# Altium PCB SX1308_GTW_e381v02c.PcbDoc (part 2 of 3)
Units mil, origin at the board's own origin, x right, y up, seen from the top; angles counter-clockwise.
Board outline 2874.02 x 1220.47 mil, 4 copper layers (Top Layer, MidLayer1 - GND, MidLayer2 - Power, Bottom Layer), stack 62.441 mil thick; 180 components, 130 nets, 612 pads, 859 vias.
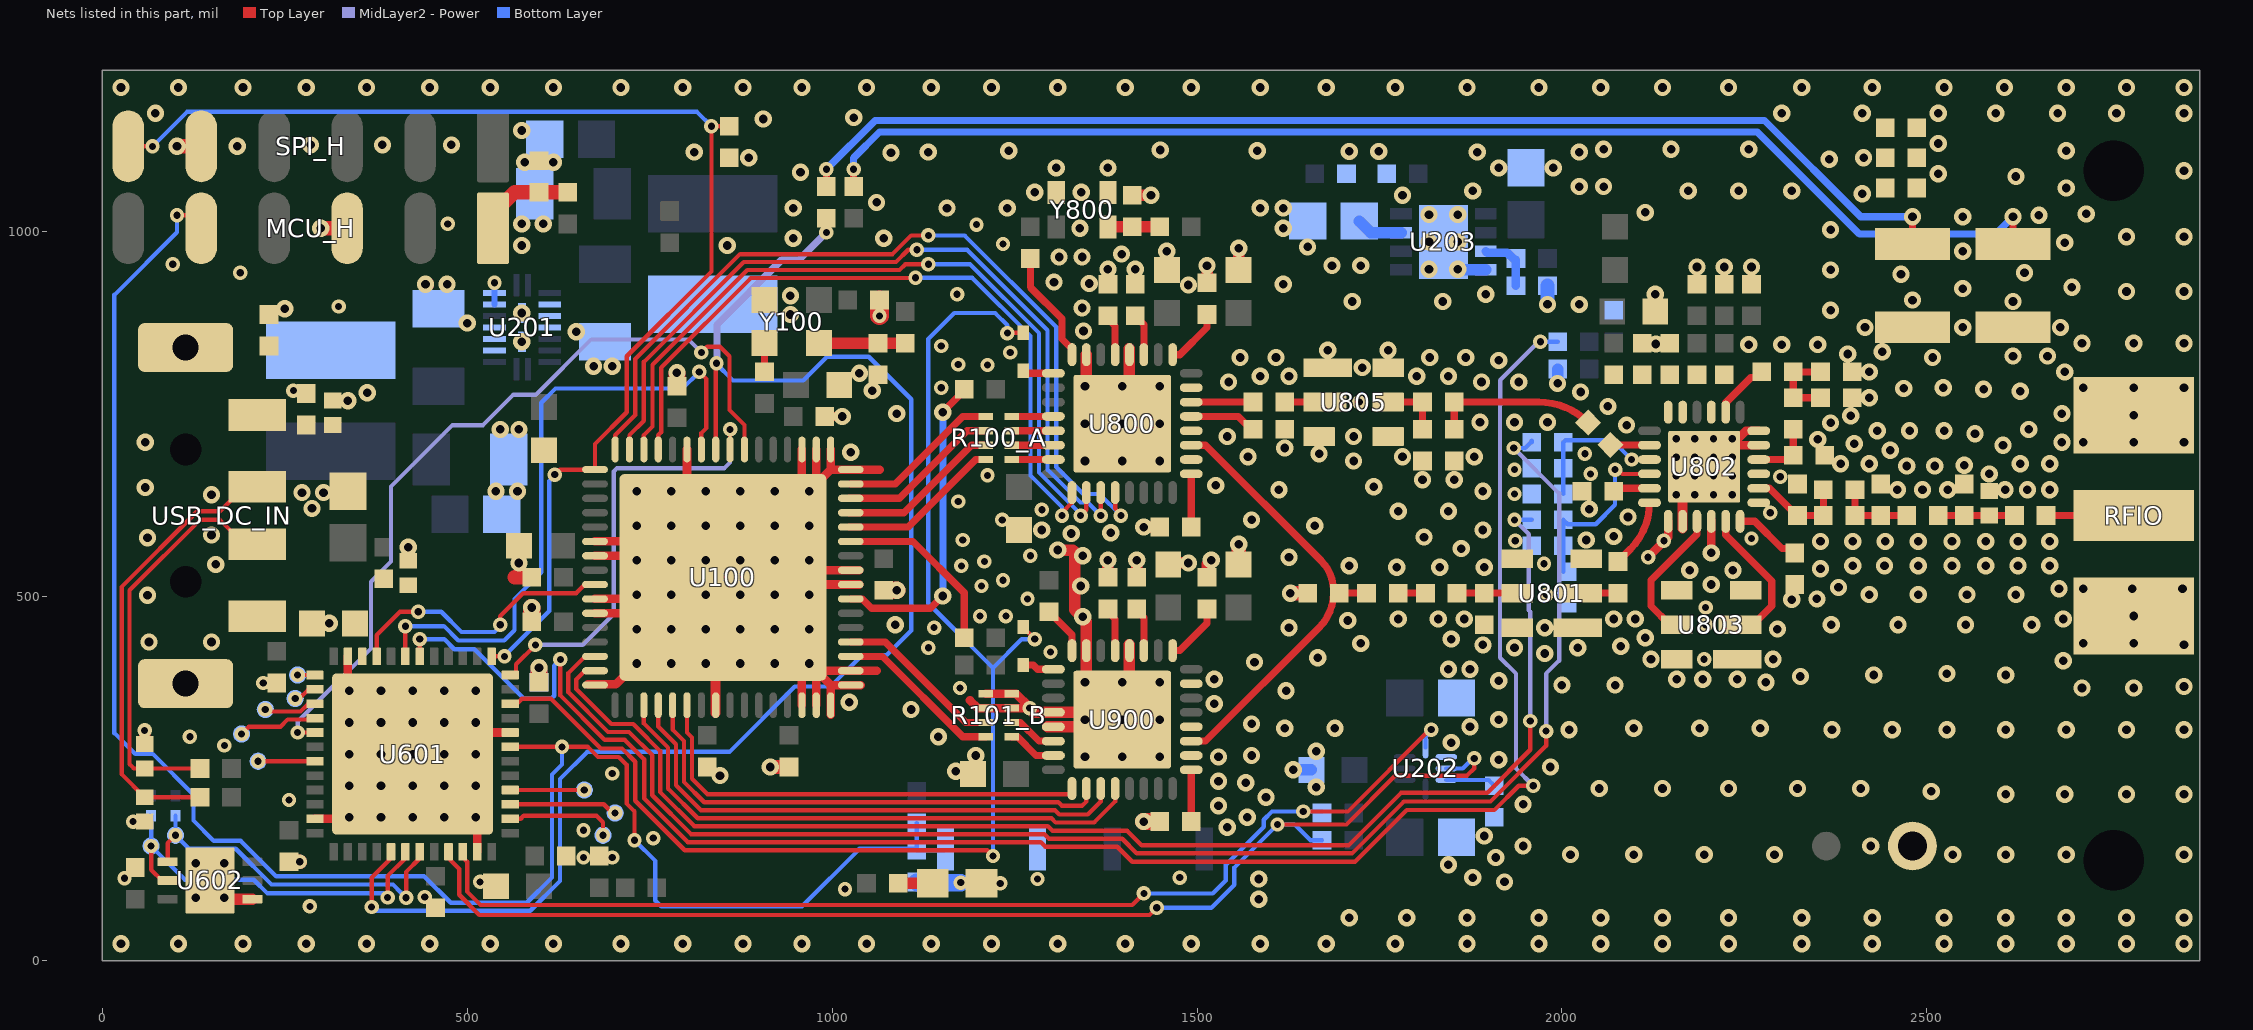
[diagram p4: the nets of this part, all layers, seen from the top]

## Via types
v1: diameter 23.62, hole 11.81, Top Layer to Bottom Layer, tented both sides, 584 vias
v2: diameter 19.68, hole 9.84, Top Layer to Bottom Layer, tented both sides, 166 vias
v3: diameter 23.62, hole 11.81, Top Layer to Bottom Layer, tented top, 89 vias
v4: diameter 19.68, hole 10, Top Layer to Bottom Layer, tented top, 16 vias
v5: diameter 25.59, hole 11.81, Top Layer to Bottom Layer, tented both sides, 3 vias
v6: diameter 18.9, hole 9.84, Top Layer to Bottom Layer, tented both sides, 1 vias

## Nets (pads, with @x,y where several pads share a name; then routed paths per layer and width w, separated by ;. In a path a pad name is that pad's centre, name@x,y a point inside that pad or via, vN(x,y) a via of type N, cw(c..) or ccw(c..) an arc to the next point about the centre after c; other vN are vias at no path point) (continued)
GND: 5V.2 868MHz.1 868MHz.2 915MHz.1 915MHz.2 C100.1 C101.1 C102.1 C104.1 C105.1 C106.1 C107.1 C108.1 C109.1 C110.1 C111.1 C112.1 C113.1 C114.1 C115.2 C201.2 C202.2 C203.2 C204.2 C205.2 C206.2 C207.2 C208.2 C209.1 C210.2 C211.2 C601.1 C602.1 C603.1 C604.1 C605.1 C606.1 C607.1 C608.1 C609.1 C610.1 C611.1 C612.1 C800.1 C802.2 C803.1 C804.2 C805.2 C806.1 C807.1 C808.1 C814.2 C815.1 C818.1 C819.1 C820.1 C821.1 C822.1 C823.1 C825.1 C826.1 C827.1 C828.2 C831.1 C832.2 C900.1 C903.1 C904.2 C905.2 C906.1 C907.1 C908.1 D201.2 D202.2 D203.2 D204.2 D801.2 FB202.2 FB203.1 GND1.1 L800.1 MCU_H.3 NRST.2 Other.1 Other.2 R101_B.1 R101_B.2 R101_B.7 R101_B.8 R110.1 R114.2 R115.2 R203.2 R602.1 R606.1 R607.1 R801.2 R802.2 R807.1 R809.1 RFIO.2 RX_ON.2 SPI_H.5 TX_ON.2 U100.6 U100.7 U100.10 U100.11 U100.16 U100.24 U100.30 U100.31 U100.32 U100.33 U100.34 U100.40 U100.41 U100.48 U100.49 U100.50 U100.51 U100.59 U100.65 U201.3 U201.4 U201.6 U201.7 U201.12 U201.13 U201.19 U201.20 U202.5 U203.8 U203.9 U601.8 U601.23 U601.35 U601.47 U601.49 U602.4 U602.7 U800.4 U800.7 U800.26 U800.28 U800.31 U800.33 U801.1 U801.3 U801.4 U801.6 U802.7 U802.8 U802.10 U802.13 U802.15 U802.17 U802.18 U802.25 U803.1 U803.3 U803.4 U803.6 U805.1 U805.3 U805.4 U805.6 U900.4 U900.7 U900.12 U900.13 U900.26 U900.28 U900.31 U900.33 Y100.2 Y800.1 Y800.2 | length 2998
  Top Layer w7.87: v2@2283.46,611.38 v2@2283.46,614.17
  Top Layer w11.81: U601.35@291.34,194.88 U601.49@346.46,194.88 ; U601.49@336.61,374.02 U601.23@336.61,417.32 ; U601.49@509.84,311.02 511.81,312.99 U601.8@559.06,312.99 ; U601.47@513.78,149.61 U601.49@513.78,196.85 ; U100.16@665.35,379.02 703.82,379.02 v3(732.28,407.48) U100.65@722.44,397.64 ; U100.11@675.2,476.38 U100.65@726.38,476.38 ; U100.10@675.2,496.06 716.54,496.06 U100.65@718.5,494.09 ; U100.7@675.2,555.12 U100.65@726.38,555.12 ; U100.6@675.2,574.8 714.57,574.8 U100.65@716.54,572.83 ; U100.65@801.18,657.48 U100.59@801.18,700.79 ; U100.65@954.72,517.72 956.69,515.75 U100.40@1025.59,515.75 U100.40@1037.4,515.75 ; U100.30@958.66,350.39 958.66,401.57 U100.65@960.63,403.54 ; U100.65@958.66,659.45 U100.51@958.66,700.79 ; U100.65@966.54,535.43 U100.41@1025.59,535.43 U100.41@1037.4,535.43 ; v3(968.5,407.48) U100.65@978.35,397.64 ; v3(968.5,643.7) 998.03,673.23 ; U100.31@978.35,350.39 U100.65@978.35,397.64 ; U100.65@978.35,655.51 U100.50@978.35,700.79 ; C105.1@990.16,746.06 v1(1013.78,746.06) ; U100.32@998.03,337.6 U100.32@998.03,350.39 998.03,377.95 ; U100.49@998.03,700.79 998.03,673.23 ; U100.33@1039.37,377.95 U100.33@1025.59,377.95 998.03,377.95 ; 1061.02,397.64 U100.34@1025.59,397.64 U100.65@978.35,397.64 ; 1064.96,673.23 U100.48@1025.59,673.23 998.03,673.23 ; 1188.98,357.03 1199.55,346.46 R101_B.2@1210.63,346.46 R101_B.7@1246.06,346.46 1270.47,346.46 v2@1270.57,346.56 ; R101_B.1@1210.63,366.14 R101_B.8@1246.06,366.14 1251.97,366.14 1270.67,347.44 v2@1270.67,346.46 ; U900.33@1452.76,320.47 U900.33@1452.76,320.87 ; v2(2118.11,553.15) 2145.67,580.71 U802.7@2145.67,602.36 ; v1(2204.72,559.06) U802.10@2204.72,604.33 ; U802.25@2234.25,714.57 2240.31,714.57 2252.12,726.38 U802.18@2269.69,726.38 ; U802.25@2238.19,706.69 U802.17@2269.69,706.69 ; U100.65@978.35,397.64 998.03,377.95
  Top Layer w13.78: U100.24@840.55,339.57 U100.24@840.55,350.39 U100.65@840.55,405.51 ; U802.8@2165.35,592.52 U802.8@2165.35,602.36 U802.25@2165.35,643.7
  Top Layer w15.75: D202.2@58.07,297.24 v2(58.07,315.94) ; U602.7@168.31,86.61 170.28,84.65 U602.4@205.71,84.65 ; U100.65@730.31,496.06 U100.65@734.25,500 ; U100.65@838.58,407.48 U100.65@840.55,405.51 ; v2@1276.57,340.55 U900.12@1303.15,340.55 U900.33@1346.46,340.55 ; U900.13@1295.28,320.87 U900.13@1303.15,320.87 U900.33@1338.58,320.87 ; v1(1309.06,562.99) 1329.92,562.99 1332.28,560.63 1332.28,481.1 1348.43,464.96 U900.7@1348.43,425.2 1348.43,383.86 U900.33@1350.39,381.89 ; U800.7@1348.43,830.71 1348.43,789.37 U800.33@1350.39,787.4 ; C904.2@1377.95,525.59 v1(1377.95,549.21) ; U900.33@1405.51,381.89 1407.48,383.86 U900.4@1407.48,425.2 U900.4@1407.48,433.07 ; U800.33@1407.48,785.43 U800.4@1407.48,830.71 U800.4@1407.48,838.58 ; C815.1@1411.42,1049.21 v1(1437.01,1049.21) ; C803.1@1415.35,927.17 v1(1415.35,947.83) ; C903.1@1417.32,525.59 v1(1417.32,549.21) ; v1(1427.17,594.49) C807.1@1448.82,594.49 ; U900.33@1433.07,318.9 U900.33@1435.04,320.87 ; U800.33@1438.98,690.94 U800.33@1442.91,687.01 ; C806.1@1458.66,946.85 v1(1458.66,972.44) ; C906.1@1460.63,543.31 1462.6,545.28 v1(1488.19,545.28) ; C905.2@1513.78,525.59 1513.78,543.31 v1(1519.69,549.21) ; C805.2@1513.78,929.13 v1(1513.78,952.76) ; C808.1@1557.09,946.85 v1(1557.09,976.38) ; v2@2259.84,578.25 v2(2259.84,578.74)
  Top Layer w19.68: v1(102.36,1116.14) SPI_H.5@135.43,1116.14 ; C603.1@255.91,135.83 v2(270.67,135.83) ; v1(299.21,1003.94) MCU_H.3@335.43,1003.94 ; 564.96,525.59 C109.1@586.61,525.59 ; v1(915.35,265.75) C111.1@940.94,265.75 ; C908.1@1557.09,543.31 v1(1557.09,570.87) ; v1(1627.95,503.94) L800.1@1648.3,503.94
  Top Layer w23.62: C107.1@588.58,464.57 v1(588.58,484.25) ; C605.1@598.43,381.89 v1(598.43,401.57) ; C106.1@787.4,789.37 v1@787.4,805.12 ; C112.1@1070.87,507.87 v1(1088.58,507.87) ; v1(1427.17,190.94) C907.1@1448.82,190.94
  Top Layer w25.59: v2(1064.96,883.86) R606.1@1064.96,905.51
  Bottom Layer w7.87: U201.6@537.4,899.61 U201.7@537.4,915.35 v2@537.4,933.07
  Bottom Layer w15.75: v1@1629.09,261.81 C208.2@1656.65,261.81 ; U203.9@1858.27,946.85 U203.8@1895.67,946.85 ; v1@1994.09,789.37 C606.1@1994.09,811.02
  Bottom Layer w19.68: v1(1980.31,899.61) R203.2@1980.31,925.2
  Bottom Layer w23.62: C607.1@598.43,381.89 v1(598.43,401.57) v1(598.43,401.57) v1@598.46,401.69 ; C609.1@1116.14,108.27 1117.2,107.2 1176.1,107.2 v2(1176.18,107.28)
  other v1: 25.59,23.62 104.33,23.62 192.91,23.62 279.53,23.62 362.2,23.62 448.82,23.62 531.5,23.62 618.11,23.62 710.63,23.62 795.28,23.62 877.95,23.62 958.66,23.62 1047.24,23.62 1135.83,23.62 1218.5,23.62 1309.06,23.62 1401.57,23.62 1492.13,23.62 1586.61,23.62 1677.17,23.62 1771.65,23.62 1870.08,23.62 1968.5,23.62 2053.15,23.62 2137.8,23.62 2228.35,23.62 2328.74,23.62 2425.2,23.62 2523.62,23.62 2608.27,23.62 2690.94,23.62 2773.62,23.62 2852.36,23.62 1708.66,59.06 1787.4,59.06 1870.08,59.06 1968.5,59.06 2053.15,59.06 2137.8,59.06 2228.35,59.06 2328.74,59.06 2425.2,59.06 2523.62,59.06 2608.27,59.06 2690.94,59.06 2773.62,59.06 2852.36,59.06 1584.65,84.65 1921.26,108.27 1584.65,112.2 1877.95,114.17 1844.49,131.89 1909.45,141.73 2011.81,145.67 2098.43,145.67 2194.88,145.67 2291.34,145.67 2535.43,145.67 2608.27,145.67 2690.94,145.67 2852.36,145.67 1946.85,157.48 2423.23,157.48 1893.7,171.26 1541.34,183.07 1568.9,196.85 1529.53,212.6 1946.85,214.57 1594.49,224.41 2608.27,228.35 2688.98,228.35 2773.62,228.35 2852.36,228.35 2505.91,232.28 2051.18,236.22 2137.8,236.22 2228.35,236.22 2322.83,236.22 2409.45,236.22 1663.39,238.19 1566.93,244.09 1529.53,246.06 846.46,253.94 1169.29,259.84 1631.89,261.81 1984.25,265.75 1913.39,275.59 1529.53,279.53 1196.85,281.5 1574.8,281.5 1663.39,287.4 1848.43,299.21 1145.67,307.09 2009.84,316.93 2370.08,316.93 2452.76,316.93 2527.56,316.93 2608.27,316.93 2690.94,316.93 2773.62,316.93 2852.36,316.93 1620.08,318.9 1688.98,318.9 2098.43,318.9 2188.98,318.9 2271.65,318.9 1874.02,320.87 1574.8,324.8 1913.39,330.71 1108.27,344.49 1523.62,352.36 1023.62,354.33 1622.05,370.08 2712.6,374.02 2783.46,374.02 2852.36,375.98 2000,377.95 2072.83,377.95 2279.53,381.89 1913.39,383.86 1523.62,385.83 2157.48,385.83 2192.91,385.83 2240.16,385.83 2326.77,389.76 2427.17,391.73 2608.27,391.73 2527.56,393.7 1844.49,399.61 1874.02,399.61 1578.74,409.45 2687.01,411.42 2122.05,413.39 2289.37,413.39 1665.35,415.35 1976.38,421.26 1935.04,429.13 2021.65,429.13 2080.71,431.1 1891.73,433.07 2852.36,433.07 1724.41,435.04 2714.57,435.04 2783.46,435.04 63.98,437.01 149.61,437.01 1848.43,440.94 2114.17,442.91 2295.28,454.72 1625.98,456.69 1976.38,456.69 1086.61,460.63 2369.09,460.63 2460.63,460.63 2553.15,460.63 2643.7,460.63 311.02,462.6 1706.69,466.54 1775.59,468.5 1830.71,468.5 1866.14,468.5 2070.87,468.5 2100.39,468.5 2687.01,468.5 1343.5,471.46 2314.96,495.08 2349.41,496.06 62.01,500.98 2421.26,501.97 2488.19,501.97 2555.12,501.97 2622.05,501.97 2681.1,509.84 2714.57,509.84 2781.5,509.84 2850.39,509.84 2378.94,511.81 1340.55,513.78 2204.72,515.75 2175.2,535.43 2234.25,535.43 2354.33,537.4 1773.62,539.37 1832.68,539.37 1893.7,539.37 1708.66,541.34 2398.62,541.34 2441.93,541.34 2488.19,541.34 2534.45,541.34 2580.71,541.34 2625,541.34 2668.31,541.34 155.51,543.31 570.87,545.28 1625.98,553.15 1343.5,555.12 1862.2,564.96 419.29,566.93 2354.33,574.8 2398.62,574.8 2442.91,574.8 2488.19,574.8 2534.45,574.8 2580.71,574.8 2625,574.8 2668.31,574.8 2033.46,576.77 62.01,579.72 1811.02,580.71 2070.87,581.69 149.61,583.66 1327.76,585.63 1381.89,586.61 1287.4,590.55 1891.73,590.55 1661.42,596.46 1574.8,604.33 2090.55,608.27 1775.59,616.14 1844.49,616.14 2037.4,619.09 287.4,620.08 149.61,638.78 273.62,641.73 303.15,641.73 539.37,643.7 568.9,643.7 1891.73,643.7 1612.2,645.67 2459.65,645.67 2494.09,645.67 2528.54,645.67 2607.28,645.67 2637.8,645.67 2668.31,645.67 59.06,648.62 1742.13,649.61 1525.59,651.57 1809.06,659.45 1852.36,659.45 2585.63,667.32 2472.44,678.15 2510.83,678.15 2551.18,679.13 2381.89,681.1 2421.26,681.1 2627.95,681.1 2668.31,681.1 1714.57,685.04 1569.88,690.94 1781.5,690.94 1879.92,690.94 1667.32,694.88 1025.59,696.85 2449.8,699.8 1620.08,702.76 2604.33,706.69 2400.59,708.66 59.06,710.63 2685.04,710.63 2714.57,710.63 2783.46,710.63 2852.36,710.63 2350.39,714.57 1541.34,718.5 1714.57,718.5 2565.94,722.44 2432.09,726.38 2476.38,726.38 2523.62,726.38 545.28,728.35 570.87,728.35 2639.76,728.35 2088.58,734.25 2368.11,737.2 1887.8,738.19 1935.04,738.19 1980.31,738.19 2395.67,747.05 1088.58,750 2685.04,750 2062.99,759.84 336.61,767.72 2421.26,771.65 363.19,778.54 2025.59,779.53 2627.95,780.51 1055.12,781.5 2577.76,783.46 2468.5,784.45 2522.64,785.43 2714.57,785.43 2783.46,785.43 2852.36,785.43 1994.09,791.34 1543.31,793.31 1889.76,793.31 1940.94,793.31 1586.61,801.18 1625.98,801.18 1801.18,801.18 1844.49,801.18 1037.4,805.12 787.4,806.1 2421.26,807.09 2688.98,807.09 1726.38,812.99 673.23,814.96 698.82,814.96 1913.39,822.83 1559.06,826.77 1608.27,826.77 1818.9,826.77 1868.11,826.77 2507.87,826.77 2618.11,828.74 2665.35,828.74 2391.73,831.69 2438.98,834.65 1679.13,836.61 1761.81,836.61 2255.91,844.49 2301.18,844.49 2350.39,844.49 2128.74,845.28 2712.6,846.46 2783.46,846.46 2852.36,846.46 574.8,848.43 649.61,862.2 1344.49,863.19 2415.35,868.11 2549.21,868.11 2683.07,868.11 500,874.02 942.91,885.83 574.8,887.8 2368.11,891.73 250,893.7 1342.52,894.69 2023.62,899.61 1712.6,903.54 1836.61,903.54 2618.11,903.54 2480.31,905.51 942.91,911.42 1895.67,913.39 2127.95,913.39 2773.62,917.32 2852.36,917.32 2549.21,921.26 2698.82,923.23 1488.19,926.18 442.91,927.17 472.44,927.17 1618.11,927.17 1352.36,928.15 1304.13,930.12 2464.57,940.94 2633.86,942.91 2368.11,946.85 1377.95,947.83 2185.04,950.79 2222.44,950.79 2259.84,950.79 1685.04,952.76 1724.41,952.76 1311.02,964.57 1342.52,964.57 1396.65,968.5 2549.21,972.44 1651.57,978.35 574.8,980.32 856.3,980.32 2688.98,984.25 946.85,990.16 1070.87,990.16 2773.62,992.13 2852.36,992.13 2368.11,1001.97 1339.57,1003.94 1618.11,1003.94 574.8,1009.84 604.33,1009.84 2549.21,1019.68 2653.54,1021.65 2718.5,1023.62 2114.17,1025.59 946.85,1031.5 1157.48,1031.5 1240.16,1031.5 1586.61,1031.5 1618.11,1031.5 1061.02,1039.37 1781.5,1049.21 2411.42,1051.18 1277.56,1053.15 1341.54,1053.15 1877.95,1055.12 2173.23,1055.12 2242.13,1055.12 2314.96,1055.12 2690.94,1059.06 2023.62,1061.02 2057.09,1061.02 2622.05,1074.8 2515.75,1078.74 956.69,1080.71 2852.36,1082.68 1307.09,1086.61 1377.95,1086.61 1913.39,1086.61 1988.19,1086.61 578.74,1094.49 618.11,1094.49 2366.14,1098.43 885.83,1100.39 2413.39,1100.39 1080.71,1107.28 811.02,1108.27 1131.89,1108.27 1883.86,1108.27 2023.62,1108.27 1708.66,1109.25 1749.02,1109.25 1242.13,1110.24 1582.68,1110.24 2690.94,1110.24 1449.8,1111.22 2057.09,1112.2 2149.61,1112.2 2255.91,1112.2 185.04,1116.14 285.43,1118.11 383.86,1118.11 478.35,1118.11 2515.75,1120.08 574.8,1137.8 905.51,1153.54 1029.53,1155.51 72.83,1161.42 2301.18,1161.42 2411.42,1161.42 2515.75,1161.42 2594.49,1161.42 2679.13,1161.42 2759.84,1161.42 2852.36,1161.42 25.59,1196.85 104.33,1196.85 192.91,1196.85 279.53,1196.85 362.2,1196.85 448.82,1196.85 531.5,1196.85 618.11,1196.85 710.63,1196.85 795.28,1196.85 877.95,1196.85 958.66,1196.85 1047.24,1196.85 1135.83,1196.85 1218.5,1196.85 1309.06,1196.85 1401.57,1196.85 1492.13,1196.85 1586.61,1196.85 1677.17,1196.85 1771.65,1196.85 1870.08,1196.85 1968.5,1196.85 2053.15,1196.85 2137.8,1196.85 2228.35,1196.85 2328.74,1196.85 2425.2,1196.85 2523.62,1196.85 2606.3,1196.85 2690.94,1196.85 2773.62,1196.85 2852.36,1196.85
  other v2: 284.45,74.8 441.93,87.6 1017.71,98.43 1230.31,106.3 517.72,108.27 1281.5,112.2 30.51,113.19 1476.38,114.17 659.45,141.73 698.82,141.73 754.92,168.31 659.45,179.13 42.32,190.94 698.82,256.89 167.32,295.28 120.08,307.09 1270.87,346.46 1175.2,374.02 220.47,380.91 2194.88,413.39 1299.21,423.23 1131.89,429.13 1139.76,456.69 2196.85,460.63 1202.76,472.44 1238.19,472.44 2196.85,484.25 1267.72,496.06 1978.35,501.97 1204.72,513.78 1234.25,521.65 1177.17,541.34 1975.39,544.29 1208.66,547.24 1271.65,555.12 1936.02,575.79 2139.76,575.79 1179.13,576.77 1233.07,604.33 2285.43,614.17 1287.4,618.11 1172.83,629.53 1935.04,639.76 2299.21,663.39 1212.99,665.35 2039.37,667.32 1935.04,673.23 2031.5,694.88 1722.44,765.75 261.81,781.5 1149.61,785.43 1212.99,816.54 1172.83,817.32 1244.09,833.66 1149.61,842.52 323.82,896.65 1171.26,913.39 537.4,929.13 188.98,942.91 96.46,954.72 1234.25,982.28 1197.83,1008.86 473.43,1009.84
  other v3: 127.95,86.61 167.32,86.61 127.95,133.86 167.32,133.86 338.58,196.85 381.89,196.85 425.2,196.85 468.5,196.85 511.81,196.85 338.58,240.16 381.89,240.16 425.2,240.16 468.5,240.16 511.81,240.16 1346.46,279.53 1397.64,279.53 1448.82,279.53 338.58,283.46 381.89,283.46 425.2,283.46 468.5,283.46 511.81,283.46 338.58,326.77 381.89,326.77 425.2,326.77 468.5,326.77 511.81,326.77 1346.46,330.71 1397.64,330.71 1448.82,330.71 338.58,370.08 381.89,370.08 425.2,370.08 468.5,370.08 511.81,370.08 1346.46,381.89 1397.64,381.89 1448.82,381.89 779.53,407.48 826.77,407.48 874.02,407.48 921.26,407.48 732.28,454.72 779.53,454.72 826.77,454.72 874.02,454.72 921.26,454.72 968.5,454.72 732.28,501.97 779.53,501.97 826.77,501.97 874.02,501.97 921.26,501.97 968.5,501.97 732.28,549.21 779.53,549.21 826.77,549.21 874.02,549.21 921.26,549.21 968.5,549.21 732.28,596.46 779.53,596.46 826.77,596.46 874.02,596.46 921.26,596.46 968.5,596.46 732.28,643.7 779.53,643.7 826.77,643.7 874.02,643.7 921.26,643.7 1346.46,685.04 1397.64,685.04 1448.82,685.04 1346.46,736.22 1397.64,736.22 1448.82,736.22 1346.46,787.4 1397.64,787.4 1448.82,787.4 1817.91,947.83 1857.28,947.83 1817.91,985.24 1857.28,985.24 1817.91,1022.64 1857.28,1022.64
  other v4: 2156.5,638.78 2182.09,638.78 2207.68,638.78 2233.27,638.78 2156.5,664.37 2182.09,664.37 2207.68,664.37 2233.27,664.37 2156.5,689.96 2182.09,689.96 2207.68,689.96 2233.27,689.96 2156.5,715.55 2182.09,715.55 2207.68,715.55 2233.27,715.55
  other v6: 255.91,220.47
GPIO0: U100.58 U601.19 | length 879
  Top Layer w5.91: U601.19@415.35,417.32 v2(415.35,458.66) ; v2(817.95,807.12) 827.76,797.24 827.76,730.31 820.87,723.43 U100.58@820.87,700.79
  Bottom Layer w5.91: v2(415.35,458.66) 415.43,458.74 468.1,458.74 487.86,438.98 550.76,438.98 564.96,453.18 564.96,496 601.54,532.57 601.54,764.92 620.91,784.29 795.12,784.29 v2(817.95,807.12)
GPIO2: U100.56 U601.12 | length 616.8
  Top Layer w5.91: U601.12@560.04,391.73 566.93,391.73 566.93,406.5 v2(593.5,433.07) ; U100.56@860.24,700.79 v2(860.24,728.35)
  MidLayer2 - Power w5.91: v2(593.5,433.07) 658.46,433.07 700.71,475.31 700.71,670.62 705.37,675.28 852.44,675.28 860.24,683.07 v2(860.24,728.35)
GPIO3: U100.55 U601.29 | length 1113
  Top Layer w5.91: v2(267.72,312.99) U601.29@291.34,312.99 ; v2(820.87,833.66) 828.74,841.54 846.46,841.54 859.37,828.62 859.37,754.8 879.92,734.25 U100.55@879.92,700.79
  MidLayer2 - Power w5.91: v2(267.72,312.99) 267.72,327.76 368.11,428.15 368.11,519.68 395.67,547.24 395.67,650 479.85,734.17 521.57,734.17 562.99,775.59 578.74,775.59 ; 578.74,775.67 594.14,775.67 669.85,851.38 803.15,851.38 v2(820.87,833.66)
GPIO_DBG1: GPIO_DBG1.1 U601.3 | length 148.6
  Top Layer w5.91: U601.3@559.06,214.57 687.01,214.57 698.82,202.76 v2(702.76,202.76)
GPIO_DBG2: GPIO_DBG2.1 U601.4 | length 101.4
  Top Layer w5.91: U601.4@559.06,234.25 v2(660.43,234.25)
I2C1_SCL: R604.1 U601.43 U602.1 USART_RX.1 | length 489.6
  Top Layer w5.91: U602.1@89.57,135.83 89.57,161.42 v2(100.39,172.24) ; v2(416.36,86.62) 416.36,121.99 435.04,140.67 U601.43@435.04,149.61
  Bottom Layer w5.91: R604.1@100.39,198.82 v2(100.39,172.24) 119.02,153.62 182.99,153.62 231.98,104.63 398.36,104.63 408.78,94.21 ; 408.78,94.17 v2(416.36,86.62)
I2C1_SDA: R603.1 U601.42 U602.2 USART_TX.1 | length 529
  Top Layer w5.91: v2(66.93,157.48) 66.93,125 81.69,110.24 U602.2@89.57,110.24 ; v2(390.99,86.84) 390.99,116.31 415.35,140.67 U601.42@415.35,149.61
  Bottom Layer w5.91: R603.1@65.94,198.82 66.93,197.83 v2(66.93,157.48) 113.19,111.22 207.68,111.22 226.3,92.6 384.76,92.6 v2@390.75,86.61
IRXD_A: R100_A.5 U800.15 | length 57.5
  Top Layer w9.84: R100_A.5@1246.06,687.01 U800.15@1303.54,687.01
IRXD_B: R101_B.5 U900.15 | length 67.7
  Top Layer w9.84: R101_B.5@1246.06,307.09 1253.94,307.09 1279.53,281.5 U900.15@1303.15,281.5
ITXD_A: R100_A.7 U800.13 | length 57.1
  Top Layer w9.84: R100_A.7@1246.06,726.38 U800.13@1303.15,726.38
LNA_EN: C102.2 R103.2 R115.1 U802.3 | length 200.2
  Top Layer w5.91: v2(2095.47,687.01) U802.3@2120.08,687.01
  Bottom Layer w5.91: C102.2@2001.97,639.76 R115.1@2001.97,675.2 R103.2@2001.97,709.65 ; R103.2@2001.97,710.63 2004.92,713.58 2068.9,713.58 v2(2095.47,687.01)
MISO_A: U100.62 U800.18 | length 1055.2
  Top Layer w5.91: U100.62@742.13,700.79 742.13,720.47 753.94,732.28 753.94,816.93 883.7,946.69 1092.36,946.69 1100.39,954.72 v2(1131.89,954.72) ; v2(1340.55,610.24) 1348.43,618.11 U800.18@1348.43,641.73
  Bottom Layer w5.91: v2(1131.89,954.72) 1188.98,954.72 1283.46,860.24 1283.46,669.29 1340.55,612.2 v2(1340.55,610.24)
MISO_B: U100.21 U900.18 | length 710.5
  Top Layer w5.91: U100.21@781.5,350.39 781.5,316.93 797.09,301.34 797.09,245.14 824.87,217.36 1310.04,217.36 1314.88,212.52 1342.44,212.52 1348.43,218.5 U900.18@1348.43,238.19 ; U900.18@1348.43,224.41 U900.18@1348.43,236.22
MOSI_A: U100.63 U800.19 | length 1112
  Top Layer w5.91: U100.63@722.44,700.79 722.44,720.47 742.13,740.16 742.13,820.87 878.86,957.6 1087.52,957.6 1104.33,974.41 v2(1116.14,974.41) ; v2(1368.11,610.24) U800.19@1368.11,641.73
  Bottom Layer w5.91: v2(1116.14,974.41) 1185.04,974.41 1295.28,864.17 1295.28,673.23 1340.47,628.03 1350.31,628.03 v2(1368.11,610.24)
MOSI_B: U100.20 U900.19 | length 745.4
  Top Layer w5.91: U100.20@761.81,352.36 761.81,321.19 786.18,296.82 786.18,240.62 820.35,206.46 1305.35,206.46 1311.14,200.67 1350.28,200.67 1368.11,218.5 U900.19@1368.11,236.22
Net5V_1: 5V.1 R208.2 | length 47.2
  Top Layer w15.75: R208.2@1090.55,106.3 5V.1@1137.8,106.3
NetC113_2: C113.2 FB102.2 Y100.4 | length 118.9
  Top Layer w15.75: Y100.4@982.28,846.46 1025.59,846.46 C113.2@1062.99,846.46 ; C113.2@1062.99,844.49 1064.96,846.46 FB102.2@1100.39,846.46
NetC207_1: C207.1 FB204.2 FB205.2 U203.3 | length 63.6
  Bottom Layer w15.75: C207.1@1722.44,1013.78 1738.19,998.03 U203.3@1779.53,998.03
NetC209_2: C209.2 U202.7 | length 69
  Bottom Layer w5.91: U202.7@1841.69,248.03 1899.61,248.03 C209.2@1907.48,240.16
NetC608_2: C608.2 U601.22
NetC610_2: C610.2 FB602.1 MCU_H.1 | length 116.6
  Top Layer w19.68: MCU_H.1@535.43,1023.62 564.96,1053.15 C610.2@598.43,1053.15 FB602.1@637.8,1053.15 FB602.1@639.76,1053.15
NetC801_2: C801.2 U800.8 | length 191
  Top Layer w9.84: C801.2@1271.65,964.57 1271.65,933.07 ; C801.2@1271.65,966.54 C801.2@1271.65,962.6 1271.65,933.07 ; U800.8@1328.74,830.71 1328.74,838.58 1314.96,852.36 1314.96,879.92 1271.65,923.23 1271.65,933.07
NetC802_1: C802.1 U800.29 | length 92
  Top Layer w9.84: U800.29@1492.13,746.06 1556.64,746.06 1574.36,728.35 C802.1@1576.77,728.35
NetC803_2: C803.2 U800.3 | length 59.4
  Top Layer w9.84: C803.2@1415.35,883.86 1427.17,872.05 U800.3@1427.17,830.71 ; C803.2@1415.35,885.83 C803.2@1416.34,884.84
NetC804_1: C804.1 U800.5 | length 56.1
  Top Layer w9.84: C804.1@1375.98,881.89 1387.8,870.08 U800.5@1387.8,830.71
NetC805_1: C805.1 U800.1 | length 80.5
  Top Layer w9.84: U800.1@1466.54,830.71 1476.38,830.71 1513.78,868.11 C805.1@1513.78,885.83
NetC807_2: C807.2 U800.25 | length 74.8
  Top Layer w9.84: C807.2@1492.13,592.52 C807.2@1492.13,594.49 U800.25@1492.13,667.32
NetC813_1: C813.1 L801.2 | length 37.4
  Top Layer w9.84: L801.2@1775.59,503.94 C813.1@1812.99,503.94
NetC813_2: C813.2 C814.1 U801.5 | length 82.7
  Top Layer w9.84: C813.2@1856.3,503.94 C814.1@1893.7,503.94 U801.5@1938.98,503.94
NetC815_2: C815.2 FB801.2 Y800.4 | length 70.9
  Top Layer w15.75: Y800.4@1377.95,1005.91 C815.2@1411.42,1005.91 FB801.2@1448.82,1005.91
NetC816_1: C816.1 U800.30 | length 84.6
  Top Layer w9.84: U800.30@1492.13,765.75 C816.1@1576.77,765.75
NetC816_2: C816.2 U805.2 | length 55.1
  Top Layer w9.84: C816.2@1620.08,765.75 U805.2@1675.2,765.75
NetC817_1: C817.1 R808.2 R809.2 | length 228.4
  Top Layer w9.84: R809.2@1852.36,728.35 R808.2@1852.36,765.75 1968.28,765.75 cw(c1968.28,670.16) C817.1@2035.87,737.75
NetC817_2: C817.2 U802.2 | length 53.2
  Top Layer w9.84: C817.2@2066.93,706.69 2067.01,706.77 2120,706.77 U802.2@2120.08,706.69
NetC819_2: C819.2 L803.1 U802.23
NetC821_2: C821.2 L804.1 U802.24
NetC824_1: C824.1 U801.2 | length 51.2
  Top Layer w9.84: U801.2@2025.59,503.94 C824.1@2076.77,503.94
NetC824_2: C824.2 U802.6 | length 94.8
  Top Layer w9.84: C824.2@2076.77,547.24 2093.63,564.1 ccw(c2029.78,627.95) U802.6@2120.08,627.95
NetC825_2: C825.2 C826.2 L808.2 L809.1 | length 113.4
  Top Layer w9.84: C825.2@2352.36,807.09 C825.2@2354.33,809.06 ; C826.2@2354.33,771.65 L809.1@2316.93,771.65 L808.2@2316.93,807.09 2353.35,807.09 C825.2@2354.33,808.07
NetC827_2: C827.2 L809.2 U802.16 | length 88.4
  Top Layer w9.84: U802.16@2269.69,687.01 2314.96,687.01 2316.93,688.98 C827.2@2316.93,692.91
  Top Layer w10.12: C827.2@2316.93,691.93 L809.2@2316.93,728.35
NetC828_1: C828.1 C829.1 D801.1 L802.2 | length 104.3
  Top Layer w9.84: L802.2@2515.75,610.24 C828.1@2551.18,610.24 D801.1@2585.63,610.24 C829.1@2620.08,610.24
NetC829_2: C829.2 RFIO.1 | length 117.1
  Top Layer w9.84: C829.2@2663.39,610.24 RFIO.1@2780.51,610.24
NetC830_1: C830.1 C832.1 L802.1 L807.2 | length 106.3
  Top Layer w9.84: C830.1@2401.57,645.67 L807.2@2401.57,610.24 C832.1@2437.01,610.24 L802.1@2472.44,610.24
NetC830_2: C830.2 C831.2 L807.1 U802.14 | length 140.7
  Top Layer w9.84: U802.14@2269.69,647.64 2284.45,647.64 2320.87,611.22 C831.2@2322.83,611.22 ; C831.2@2324.41,610.24 C831.2@2322.83,610.24 L807.1@2358.27,610.24 C830.2@2358.27,645.67
NetC901_1: C901.1 U900.8 | length 66.2
  Top Layer w9.84: C901.1@1297.24,478.35 1328.74,446.85 U900.8@1328.74,425.2
NetC903_2: C903.2 U900.3 | length 61.2
  Top Layer w9.84: C903.2@1417.32,482.28 1417.32,480.32 1427.17,470.47 U900.3@1427.17,425.2
NetC904_1: C904.1 U900.5 | length 61.2
  Top Layer w9.84: C904.1@1377.95,482.28 1377.95,478.35 1387.8,468.5 U900.5@1387.8,425.2
NetC905_1: C905.1 U900.1 | length 82.4
  Top Layer w9.84: U900.1@1466.54,425.2 1476.38,425.2 1513.78,462.6 C905.1@1513.78,482.28
NetC907_2: C907.2 U900.25 | length 72.8
  Top Layer w9.84: C907.2@1492.13,188.98 C907.2@1492.13,190.94 U900.25@1492.13,261.81
NetD201_1: D201.1 FB201.1 USB_DC_IN.1
NetD202_1: D202.1 R206.1 USB_DC_IN.2 | length 547.6
  Top Layer w5.91: R206.1@133.86,263.78 96.46,263.78 D202.1@58.07,263.78 43.31,263.78 37.4,269.68 37.4,507.87 133.86,604.33 161.42,604.33 192.91,572.83 USB_DC_IN.2@192.91,570.87
NetD203_1: D203.1 R207.1 USB_DC_IN.3 | length 620.6
  Top Layer w5.91: R207.1@133.86,222.44 131.89,224.41 96.46,224.41 D203.1@58.07,224.41 26.5,255.98 26.5,512.39 130.25,616.14 161.42,616.14 194.88,649.61 USB_DC_IN.3@212.6,649.61
NetD204_1: D204.1 FB202.1 USB_DC_IN.4
NetD800_1: D800.1 U800.9 | length 43
  Top Layer w10.12: D800.1@1261.81,809.06 1265.75,805.12 U800.9@1303.15,805.12
NetD900_1: D900.1 U900.9 | length 43.8
  Top Layer w10.12: D900.1@1261.81,405.51 1275.59,405.51 1281.5,399.61 U900.9@1303.15,399.61
NetFB203_2: FB203.2 USB_DC_IN.5 USB_DC_IN.6
NetL200_2: L200.2 U201.2
NetL201_1: L201.1 U201.11
NetL800_2: L800.2 L801.1 U800.27 U900.27 | length 621.1
  Top Layer w9.84: U900.27@1492.13,301.18 1511.81,301.18 1667.52,456.89 ccw(c1620.47,503.94) L800.2@1687.01,503.94 ; U800.27@1492.13,706.69 1511.81,706.69 ; 1508.86,706.69 1511.81,706.69 ; L800.2@1687.01,507.87 ccw(c1629.98,507.87) 1670.3,548.2 1511.81,706.69 ; L800.2@1694.88,503.94 L801.1@1732.28,503.94
NetL805_1: L805.1 U802.21
NetL808_1: L808.1 U802.20 | length 79.5
  Top Layer w9.84: U802.20@2224.41,751.97 2224.41,764.76 2258.86,799.21 2265.75,799.21 L808.1@2273.62,807.09
NetR100_A_1: R100_A.1 U100.47 | length 223.4
  Top Layer w9.84: U100.47@1025.59,653.54 1086.61,653.54 1179.13,746.06 R100_A.1@1210.63,746.06
NetR100_A_2: R100_A.2 U100.46 | length 225.3
  Top Layer w9.84: U100.46@1023.62,633.86 U100.46@1025.59,633.86 1092.52,633.86 1185.04,726.38 R100_A.2@1210.63,726.38
NetR100_A_3: R100_A.3 U100.45 | length 225.3
  Top Layer w9.84: U100.45@1023.62,614.17 U100.45@1025.59,614.17 1098.43,614.17 1190.94,706.69 R100_A.3@1210.63,706.69
NetR100_A_4: R100_A.4 U100.44 | length 225.3
  Top Layer w9.84: U100.44@1023.62,594.49 U100.44@1025.59,594.49 1104.33,594.49 1196.85,687.01 R100_A.4@1210.63,687.01
NetR101_B_3: R101_B.3 U100.36 | length 230.7
  Top Layer w9.84: U100.36@1025.59,437.01 1072.83,437.01 1183.07,326.77 R101_B.3@1210.63,326.77
NetR101_B_4: R101_B.4 U100.35 | length 230.7
  Top Layer w9.84: U100.35@1025.59,417.32 1068.9,417.32 1179.13,307.09 R101_B.4@1210.63,307.09
NetR102_2: R102.2 Y100.3 | length 39.4
  Top Layer w9.84: R102.2@907.48,807.09 Y100.3@907.48,846.46
NetR103_1: R103.1 U100.14 | length 2067.8
  Top Layer w5.91: U100.14@675.2,417.32 661.42,417.32 638.62,394.53 638.62,368.1 692.91,313.82 721.61,313.82 753.46,281.97 753.46,227.07 806.8,173.74 1290.83,173.74 1297.09,167.48 1397.48,167.48 1417.56,147.4 1712.36,147.4 1783.46,218.5 1902.06,218.5 1978.35,294.79 v2(1978.35,314.96)
  MidLayer2 - Power w5.91: v2(1934.06,702.76) 1996.14,640.67 1996.14,411.5 1978.35,393.7 v2(1978.35,314.96)
  Bottom Layer w5.91: v2(1934.06,702.76) 1949.8,702.76 R103.1@1957.68,710.63 ; R103.1@1958.17,712.11 R103.1@1958.66,712.6 ; R103.1@1958.66,710.63 R103.1@1957.68,710.63 ; R103.1@1958.66,711.61 R103.1@1957.68,710.63
NetR105_1: R105.1 RX_ON.1 | length 1634.3
  Top Layer w9.84: R105.1@992.13,1061.02 v2(992.13,1084.65) ; RX_ON.1@2480.31,982.28 v1(2480.31,1019.68)
  Bottom Layer w9.84: v2(992.13,1084.65) 1059.06,1151.57 2277.56,1151.57 2409.45,1019.68 v1@2478.35,1019.68 ; v1@2480.31,1017.72 v1@2478.35,1019.68 ; v1(2480.31,1019.68) v1@2478.35,1019.68
NetR106_1: R106.1 TX_ON.1 | length 1747.8
  Top Layer w9.84: R106.1@1029.53,1061.02 v2(1029.53,1084.65) ; TX_ON.1@2618.11,982.28 v1(2618.11,1019.68)
  Bottom Layer w9.84: v2(1029.53,1084.65) 1029.53,1100.39 1064.96,1135.83 2267.72,1135.83 2407.56,995.98 2594.41,995.98 v1(2618.11,1019.68)
NetR108_1: R108.1 U100.15 | length 1875.8
  Top Layer w5.91: U100.15@675.2,397.64 661.42,397.64 649.53,385.75 649.53,372.62 697.42,324.72 727.44,324.72 731.22,320.94 764.37,287.79 764.37,231.59 811.31,184.65 1295.67,184.65 1301.93,178.39 1404.29,178.39 1424.37,158.31 1707.52,158.31 1779.53,230.32 1897.64,230.32 1956.69,289.37 v2(1956.69,328.74)
  MidLayer2 - Power w5.91: v2(1935.04,604.33) 1954.72,584.65 1954.72,480.32 1956.61,478.43 1956.61,328.81 v2(1956.69,328.74)
  Bottom Layer w5.91: v2@1934.06,605.32 v2(1935.04,604.33) R108.1@1958.66,604.33
NetR111_1: R111.1 U100.43 | length 246.2
  Top Layer w9.84: U100.43@1025.59,574.8 1110.8,574.8 1181.1,504.5 R111.1@1181.1,442.91
NetR113_1: R113.1 U100.39 | length 433.8
  Top Layer w9.84: U100.39@1025.59,496.06 1041.34,496.06 1054.13,483.27 1134.84,483.27 v1(1151.57,500) ; v1(1151.57,751.97) 1181.1,781.5 R113.1@1181.1,783.46
  Bottom Layer w9.84: v1(1151.57,500) 1151.57,501.97 1151.79,502.19 v1@1151.79,751.75
NetR202_2: R202.2 R203.1 U203.7 | length 81.7
  Bottom Layer w11.81: U203.7@1895.67,972.44 1897.64,970.47 1925.2,970.47 1935.04,960.63 1937.01,960.63 R203.1@1937.01,925.2
NetR601_1: R601.1 U601.18 | length 2523
  Top Layer w5.91: U601.18@435.04,417.32 v2(435.04,440.94) ; v2(627.72,413.15) 627.72,363.59 687.17,304.13 ; 687.01,304.13 687.17,304.13 ; v2(1960.63,240.16) 1940.94,240.16 1907.48,206.69 1787.4,206.69 1716.61,135.91 1411.34,135.91 1390.67,156.57 1292.24,156.57 1285.98,162.83 802.28,162.83 742.56,222.56 742.56,276.14 715.79,302.91 688.39,302.91 687.17,304.13
  MidLayer2 - Power w5.91: 1915.28,761.81 1915.28,415.43 1937.01,393.7 1937.01,263.78 v2(1960.63,240.16) ; 1915.35,761.81 1915.35,795.67 1968.11,848.43 v2(1970.47,848.43)
  Bottom Layer w5.91: v2(435.04,440.94) 468.5,440.94 482.28,427.17 509.84,427.17 577.6,359.41 615.31,359.41 619.17,363.27 619.17,404.61 v2(627.72,413.15) ; v2(1970.47,848.43) R601.1@1994.09,848.43
NetR801_1: R801.1 U802.12 | length 92.7
  Top Layer w9.84: U802.12@2244.09,602.36 2264.16,602.36 2301.57,564.96 2312.99,564.96 R801.1@2318.9,559.06
NetR802_1: R802.1 U802.5 | length 50
  Top Layer w9.84: R802.1@2070.87,645.67 2072.83,647.64 U802.5@2120.08,647.64
NetR807_2: R807.2 R808.1 U805.5 | length 84.6
  Top Layer w9.84: U805.5@1761.81,765.75 R808.1@1809.06,765.75 R807.2@1809.06,728.35
NetU802_9: U802.9 U803.5 | length 199.7
  Top Layer w9.84: U803.5@2157.48,460.63 U803.5@2151.57,460.63 ; U803.5@2159.45,456.69 2155.51,456.69 U803.5@2151.57,460.63 ; U802.9@2185.04,604.33 2185.04,584.65 2122.05,521.65 2122.05,486.22 2147.64,460.63 U803.5@2151.57,460.63
NetU802_11: U802.11 U803.2 | length 196.1
  Top Layer w9.84: U802.11@2224.41,602.36 2224.41,583.73 2287.4,520.74 2287.4,486.22 2261.81,460.63 U803.2@2244.09,460.63
NRST: C609.2 MCU_H.5 NRST.1 R605.1 U601.7 | length 2550.5
  Top Layer w5.91: v2(102.36,1021.65) 135.43,1021.65 MCU_H.5@135.43,1003.94 ; U601.7@559.06,293.31 v2(629.92,293.31) 665.35,293.31 679.13,279.53 707.68,279.53 718.5,268.7 718.5,215.77 729.33,204.94 v2(729.33,165.35)
  Bottom Layer w5.91: v2(102.36,1021.65) 102.36,998.45 16.57,912.67 16.57,312.17 45.28,283.46 69.32,283.46 125,227.78 125,192.37 152.84,164.53 189.8,164.53 238.19,116.14 440.94,116.14 477.36,79.72 581.69,79.72 616.22,114.25 616.22,255.55 629.92,269.25 v2(629.92,293.31) ; v2(729.33,165.35) 757.87,136.81 757.87,82.68 765.75,74.8 958.66,74.8 1037.4,153.54 1116.14,153.54 R605.1@1116.14,188.98 ; C609.2@1116.14,151.57 NRST.1@1153.54,151.57
NSS_A: U100.64 U800.20 | length 1177
  Top Layer w5.91: U100.64@702.76,700.79 702.76,720.47 730.31,748.03 730.31,824.8 874.02,968.5 1082.68,968.5 1108.27,994.09 v2(1131.89,994.09) ; U800.20@1387.8,641.73 1387.8,620.08 1395.67,612.2 v2(1395.67,610.24)
  Bottom Layer w5.91: v2(1131.89,994.09) 1181.59,994.09 1307.09,868.6 1307.09,676.84 1344.16,639.76 1366.14,639.76 v2(1395.67,610.24)
NSS_B: U100.19 U900.20 | length 789.4
  Top Layer w5.91: U100.19@742.13,350.39 742.13,325.45 775.28,292.3 775.28,236.11 815.83,195.55 1300.51,195.55 1306.3,189.76 1359.06,189.76 1387.8,218.5 U900.20@1387.8,236.22
PA_EN: C114.2 R108.2 R114.1 U802.4 | length 253.1
  Top Layer w5.91: v2(2072.83,673.23) 2076.77,673.23 2082.68,667.32 U802.4@2120.08,667.32
  Bottom Layer w5.91: R114.1@2001.97,533.46 C114.2@2001.97,568.9 R108.2@2001.97,604.33 2007.87,598.43 2046.26,598.43 2072.83,625 v2(2072.83,673.23)
PACKETSENT_IRQ: PacketSent_IRQ.1 U601.2 | length 150
  Top Layer w5.91: U601.2@559.06,194.88 573.4,194.88 577.34,198.82 677.17,198.82 686.02,189.96 v2@686.02,172.24
  other v2: 686.1,172.32
PPS: U100.9 U601.21 | length 387.9
  Top Layer w5.91: U601.21@375.98,417.32 375.98,446.43 407.9,478.35 v2(433.07,478.35) ; v2(545.28,460.63) 545.28,472.44 576.85,504.02 649.36,504.02 661.1,515.75 U100.9@675.2,515.75
  Bottom Layer w5.91: v2(433.07,478.35) 464.57,478.35 492.13,450.79 537.4,450.79 545.28,458.66 v2(545.28,460.63)
QRXD_A: R100_A.6 U800.14 | length 57.1
  Top Layer w9.84: R100_A.6@1246.06,706.69 U800.14@1303.15,706.69
QRXD_B: R101_B.6 U900.14 | length 67.7
  Top Layer w9.84: R101_B.6@1246.06,326.77 1257.87,326.77 1283.46,301.18 U900.14@1303.15,301.18
QTXD_A: R100_A.8 U800.12 | length 57.1
  Top Layer w9.84: R100_A.8@1246.06,746.06 U800.12@1303.15,746.06
RADIO2_RST: RADIO2_RST.1 U601.31 | length 77.8
  Top Layer w5.91: v2(213.58,273.62) U601.31@291.34,273.62
RADIO_EN_A: R204.2 U202.6 U601.45 | length 1692.2
  Top Layer w5.91: U601.45@474.41,149.61 476.38,147.64 476.38,138.71 489.02,126.07 489.02,90.61 516.64,62.99 1435.04,62.99 v2(1444.88,72.83) ; v2(1610.24,187.01) 1610.31,186.93 1692.83,186.93 1692.91,187.01 1704.72,187.01 1771.65,253.94 1870.08,253.94 1879.92,263.78 v2(1879.92,277.56)
  Bottom Layer w5.91: v2(1444.88,72.83) 1519.68,72.83 1551.18,104.33 1551.18,127.95 v2(1610.24,187.01) 1633.86,187.01 1655.51,165.35 R204.2@1671.26,165.35 ; U202.6@1841.69,263.78 1864.17,263.78 1877.95,277.56 v2(1879.92,277.56)
RADIO_EN_B: R205.2 U202.4 U601.46 | length 1553.9
  Top Layer w5.91: U601.46@494.09,149.61 494.09,141.73 499.92,135.91 499.92,95.13 518.36,76.69 1411.34,76.69 v2(1427.17,92.52) ; v2(1645.67,204.72) 1706.69,204.72 v2@1818.9,316.93
  Bottom Layer w5.91: v2(1427.17,92.52) 1521.65,92.52 1539.37,110.24 1539.37,131.56 1591.54,183.73 1591.54,193.47 1602.87,204.8 1645.59,204.8 v2(1645.67,204.72) R205.2@1671.26,204.72 ; U202.4@1813.15,292.32 1813.15,307.24 1818.9,312.99 v2@1818.9,316.93
  other v2: 1820.87,316.93
RADIO_RST: D800.2 D900.2 U601.10 | length 1789.4
  Top Layer w5.91: U601.10@559.06,352.36 567.99,352.36 574.96,359.33 614.75,359.33 682.91,291.18 712.1,291.18 730.31,272.96 730.31,219.38 798.12,151.57 1212.6,151.57 v2(1220.47,143.7) ; v2(1240.16,860.24) 1240.55,860.63 D800.2@1261.81,860.63 ; D900.2@1261.81,457.48 1261.81,456.69 v2(1277.56,440.94)
  Bottom Layer w5.91: v2(1220.47,143.7) 1220.47,401.57 ; v2(1240.16,860.24) 1240.16,871.06 1223.43,887.8 1167.32,887.8 1131.81,852.28 1131.81,490.24 1220.47,401.57 ; v2(1277.56,440.94) 1259.84,440.94 1220.47,401.57
RESET: R110.2 SPI_H.6 U100.1 U601.13 | length 1741.3
  Top Layer w5.91: SPI_H.6@35.43,1116.14 v2(68.9,1116.14) ; U601.13@533.46,417.32 v2(551.18,417.32) ; v2(620.08,666.34) 626.97,673.23 U100.1@675.2,673.23 675.2,708.34 718.58,751.72 718.58,828.49 834.65,944.56 v2(834.65,1143.7) R110.2@859.25,1143.7
  Bottom Layer w5.91: v2(68.9,1116.14) 116.14,1163.39 814.96,1163.39 v2(834.65,1143.7) ; v2(551.18,417.32) 555.12,421.26 555.12,422.24 612.44,479.57 612.44,657.72 620.08,665.35 v2(620.08,666.34)
RX_ON: R105.2 U100.57 U601.41 | length 2065.9
  Top Layer w5.91: v2(369.09,73.82) 369.09,114.1 395.67,140.67 U601.41@395.67,149.61 ; U100.57@840.55,710.63 v2@840.55,817.91
  MidLayer2 - Power w9.84: v2@842.52,819.88 842.52,872.05 931.1,960.63 954.72,960.63 975.39,981.3 v2(992.13,998.03)
  Bottom Layer w5.91: v2@364.17,72.83 367.13,72.83 v2@367.62,72.34 ; v2(369.09,73.82) 374.09,68.82 586.54,68.82 627.13,109.41 627.13,249.17 664.45,286.5 859.33,286.5 948.74,375.91 997.95,375.91 1041.34,419.29 1074.8,419.29 1108.35,452.83 1108.35,769.61 1050.2,827.76 993.11,827.76 960.55,795.2 864.25,795.2 v2@840.55,818.9
  other v2: 841.58,818.94
SCK_A: U100.61 U800.17 | length 1004.9
  Top Layer w5.91: U100.61@761.81,700.79 761.81,720.47 765.75,724.41 765.75,812.81 888.73,935.79 1113.95,935.79 v2(1114.23,936.07) ; v2(1314.96,610.24) 1314.96,614.17 1328.74,627.95 U800.17@1328.74,641.73
  Bottom Layer w5.91: v2(1114.23,936.07) 1191.89,936.07 1271.73,856.22 1271.73,665.28 1314.96,622.05 v2(1314.96,610.24)
SCK_B: U100.22 U900.17 | length 643
  Top Layer w5.91: U100.22@801.18,352.36 801.18,312.99 807.99,306.18 807.99,249.66 829.38,228.27 1328.66,228.27 1328.74,228.35 U900.17@1328.74,236.22
SPI2_MISO: SPI2_MISO.1 U601.27 | length 73.5
  Top Layer w5.91: v2(223.43,344.49) 226.22,341.69 271.74,341.69 282.41,352.36 U601.27@291.34,352.36
SPI2_MOSI: SPI2_MOSI.1 U601.28 | length 109.4
  Top Layer w5.91: v2(190.94,311.02) 200.87,320.94 244.09,320.94 253.94,330.79 289.45,330.79 U601.28@291.34,332.68
SPI2_NSS: SPI2_NSS.1 U601.25 | length 23.6
  Top Layer w5.91: v2(267.72,391.73) U601.25@291.34,391.73
SPI2_SCK: SPI2_SCK.1 U601.26 | length 32.2
  Top Layer w5.91: v2(264.34,359.49) 269.85,359.49 282.41,372.05 U601.26@291.34,372.05